# EAGLE board Raspberry_Pi_Circuit_Board_2 (EAGLE 9.6.2)
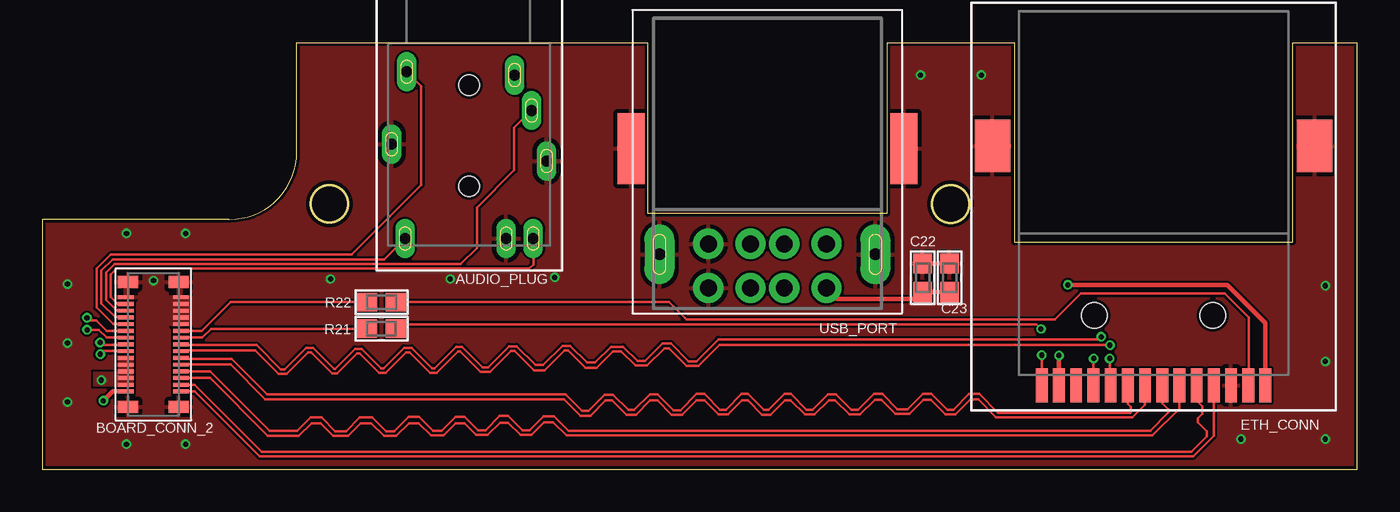
[diagram p0: board, top side]
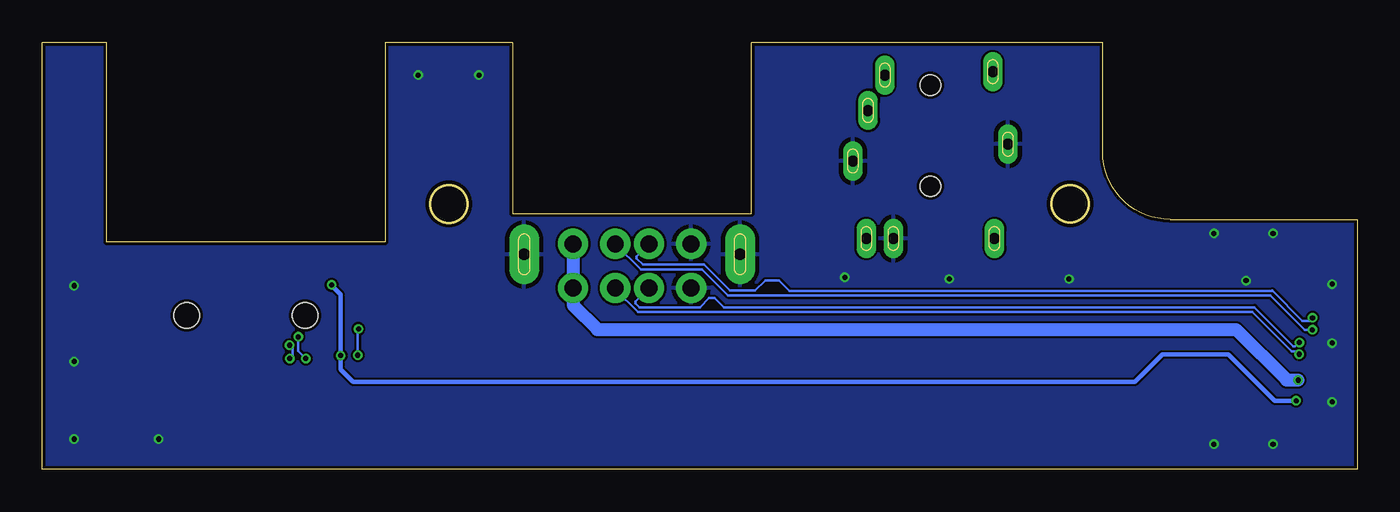
[diagram p1: board, bottom side, seen from below]

Size 78 x 25.33 mm. Coordinates in mm from the lower left corner, seen from the top.
Outline: 11.1,14.83 arc90 15.1,18.83 15.1,25.33 35.94,25.33 35.94,15.18 50.11,15.18 50.11,25.33 57.66,25.33 57.66,13.51 74.16,13.51 74.16,25.33 78,25.33 78,0 23.01,0 23.01,0 9.01,0 9.01,0 0,0 0,14.83 11.1,14.83
Outline: 11.1,14.83 11.1,14.83
Outline: circle at 53.89,15.75 radius 1.1
Outline: circle at 17.04,15.76 radius 1.1
Copper layers (1*16): Top 0.035mm / dielectric 1.6mm / Bottom 0.035mm
Design rules "default2 *": minimum track width 5mil, minimum drill 0.3mm, track to track 5mil, track to pad 5mil, pad to pad 5mil, via to via 5mil, smd to smd 5mil, copper to edge 0.2mm, drill to drill 6mil, minimum pad ring 0.13mm, minimum via ring 0.13mm, stop-mask expansion 4mil, vias tented up to drill 0mil, thermal gap 10mil

## Footprints (pad centres in the part's own frame; a part is rotated, then mirrored left to right if it is on the bottom)
AUDIOPLUG-ASJ-192-Y-TR = drill 0.65 long: 1 2.7,0.6; 2 -3.8,-9.1; 3 -3.7,0.8; 4 3.7,-1.5; 5 2.2,-9.1; 6 3.8,-9.1; MS1 4.6,-4.5; MS2 -4.6,-3.5 | hole 1.2: 0,0; 0,-6
MEZZANINE-AXT530124 = smd 0.23 x 0.92: 1 -2.8,1.64; 2 -2.4,1.64; 3 -2,1.64; 4 -1.6,1.64; 5 -1.2,1.64; 6 -0.8,1.64; 7 -0.4,1.64; 8 0,1.64; 9 0.4,1.64; 10 0.8,1.64; 11 1.2,1.64; 12 1.6,1.64; 13 2,1.64; 14 2.4,1.64; 15 2.8,1.64; 16 -2.8,-1.64; 17 -2.4,-1.64; 18 -2,-1.64; 19 -1.6,-1.64; 20 -1.2,-1.64; 21 -0.8,-1.64; 22 -0.4,-1.64; 23 0,-1.64; 24 0.4,-1.64; 25 0.8,-1.64; 26 1.2,-1.64; 27 1.6,-1.64; 28 2,-1.64; 29 2.4,-1.64; 30 2.8,-1.64 | smd 0.7 x 1.2: MP_1 -3.7,1.5; MP_2 3.7,1.5; MP_3 -3.7,-1.5; MP_4 3.7,-1.5
CAP-603 = smd 1.2 x 1.1: A -0.85,0; C 0.85,0
ETH-GLPLX-SMT-188S7-QQ-Y/G = smd 0.7 x 2.03: GND -4.59,9.015; LEDG+ 5.61,9.015; LEDG- 6.63,9.015; LEDY+ -6.63,9.015; LEDY- -5.61,9.015; TD1+ 3.57,9.015; TD1- 2.55,9.015; TD2+ 1.53,9.015; TD2- 0.51,9.015; TD3+ -0.51,9.015; TD3- -1.53,9.015; TD4+ -2.55,9.015; TD4- -3.57,9.015; VCC 4.59,9.015 | smd 2.1 x 3.1: MP_1 -9.55,-5.2; MP_2 9.55,-5.2 | hole 1.5: -3.5,4.85; 3.5,4.85
RES-603 = smd 1.2 x 1.1: A -0.85,0; C 0.85,0
USB-614108646521 = drill 1: D+1 1,0; D+2 1,-2.62; D-1 -1,0; D-2 -1,-2.62; GND1 3.5,0; GND2 3.5,-2.62; VDD1 -3.5,0; VDD2 -3.5,-2.62 | drill 0.7 pad 1.778 long: MP_1 -6.4,-2; MP_2 6.4,-2 | smd 1.6 x 4.2: MP_3 -8.1,-8.28; MP_4 8.1,-8.28

## Placement (x,y rotation side)
AUDIO_PLUG  AUDIOPLUG-ASJ-192-Y-TR  [AUDIOPLUG-ASJ-192-Y-TR]  25.32,22.8 0 top
BOARD_CONN_2  MEZZANINE-AXT530124  [MEZZANINE-AXT530124]  6.59,7.42 90 top
C22  10uF  [CAP-603]  52.21,11.37 270 top
C23  10uF  [CAP-603]  53.82,11.37 270 top
ETH_CONN  ETH-GLPLX-SMT-188S7-QQ-Y/G  [ETH-GLPLX-SMT-188S7-QQ-Y/G]  65.92,14 180 top
R21  1K  [RES-603]  20.13,8.34 180 top
R22  1K  [RES-603]  20.13,9.93 180 top
USB_CONN  USB-614108646521  [USB-614108646521]  43.01,10.76 180 top

## Library data of the parts
AUDIO_PLUG BOARD_CONN_2 C22 C23 ETH_CONN R21 R22 USB_CONN = Personal

## Nets
AGND: AUDIO_PLUG.3 BOARD_CONN_2.11
D+1: BOARD_CONN_2.8 USB_CONN.D+1
D+2: BOARD_CONN_2.10 USB_CONN.D+2
D-1: BOARD_CONN_2.7 USB_CONN.D-1
D-2: BOARD_CONN_2.9 USB_CONN.D-2
ETH0_N: BOARD_CONN_2.22 ETH_CONN.TD1-
ETH0_P: BOARD_CONN_2.23 ETH_CONN.TD1+
ETH1_N: BOARD_CONN_2.20 ETH_CONN.TD2-
ETH1_P: BOARD_CONN_2.21 ETH_CONN.TD2+
ETH2_N: BOARD_CONN_2.18 ETH_CONN.TD3-
ETH2_P: BOARD_CONN_2.19 ETH_CONN.TD3+
ETH3_N: BOARD_CONN_2.16 ETH_CONN.TD4-
ETH3_P: BOARD_CONN_2.17 ETH_CONN.TD4+
ETH_LEDG: BOARD_CONN_2.24 R21.C
ETH_LEDY: BOARD_CONN_2.25 R22.C
GND: AUDIO_PLUG.5 AUDIO_PLUG.MS1 AUDIO_PLUG.MS2 BOARD_CONN_2.15 BOARD_CONN_2.26 BOARD_CONN_2.27 BOARD_CONN_2.28 BOARD_CONN_2.29 BOARD_CONN_2.30 BOARD_CONN_2.MP_1 BOARD_CONN_2.MP_2 BOARD_CONN_2.MP_3 BOARD_CONN_2.MP_4 C22.A C23.A ETH_CONN.GND ETH_CONN.MP_1 ETH_CONN.MP_2 USB_CONN.GND1 USB_CONN.GND2 USB_CONN.MP_1 USB_CONN.MP_2 USB_CONN.MP_3 USB_CONN.MP_4
N$1: ETH_CONN.LEDG- R21.A
N$2: ETH_CONN.LEDY- R22.A
OUTL: AUDIO_PLUG.2 BOARD_CONN_2.12
OUTR: AUDIO_PLUG.4 BOARD_CONN_2.13
SHUTDOWN: AUDIO_PLUG.6 BOARD_CONN_2.14
VDD: BOARD_CONN_2.2 BOARD_CONN_2.3 BOARD_CONN_2.4 BOARD_CONN_2.5 BOARD_CONN_2.6 C22.C C23.C USB_CONN.VDD1 USB_CONN.VDD2
VDD3.3: BOARD_CONN_2.1 ETH_CONN.LEDG+ ETH_CONN.LEDY+

## Tracks (layer width: path | path; a pad name or v marks a point on that pad's centre or on a via)
AGND
  Top 0.152: BOARD_CONN_2.11 4.21,8.62 3.23,9.6 3.23,11.91 4.07,12.74 18.34,12.74 22.49,16.89 22.49,22.74 AUDIO_PLUG.3
D+1  (via drill 0.3)
  Top 0.152: BOARD_CONN_2.8 4.92,7.39 3.61,7.39 3.47,7.53 v3.43,7.53
  Bottom 0.152: USB_CONN.D+1 42.8,9.97 42.8,9.86 42.56,9.62 38.99,9.62 38.45,10.17 38.13,10.17 38.13,10.16 37.58,9.61 6.11,9.61 3.79,7.29 3.71,7.29 3.48,7.53 v3.43,7.53
D+2  (via drill 0.3)
  Top 0.152: BOARD_CONN_2.10 3.82,8.22 3.21,8.83 2.83,8.83 v2.66,9
  Bottom 0.152: USB_CONN.D+2 42.01,13.37 42.74,12.63 42.74,12.52 42.37,12.14 38.75,12.14 37.21,10.61 35.72,10.61 35.12,11.21 34.29,11.21 33.69,10.6 5.05,10.6 5.04,10.61 3.25,8.82 2.84,8.82 v2.66,9
D-1  (via drill 0.3)
  Top 0.152: BOARD_CONN_2.7 4.93,7.04 3.65,7.04 v3.45,6.84
  Bottom 0.152: USB_CONN.D-1 44.01,10.68 42.67,9.33 6.22,9.33 3.9,7.01 3.62,7.01 v3.45,6.84
D-2  (via drill 0.3)
  Top 0.152: BOARD_CONN_2.9 4.95,7.83 3.82,7.83 3.36,8.29 v2.66,8.29
  Bottom 0.152: USB_CONN.D-2 42.49,11.87 38.88,11.87 37.34,10.32 5.15,10.32 3.12,8.29 v2.66,8.29
ETH0_N  (via drill 0.3)
  Top 0.152: BOARD_CONN_2.22 8.28,7.06 12.62,7.06 14.03,5.66 14.5,5.66 15.78,6.94 15.96,6.94 17.2,5.69 17.49,5.69 18.68,6.88 18.83,6.88 19.98,5.72 20.36,5.72 21.57,6.94 21.79,6.94 23,5.72 23.39,5.72 24.66,7 24.78,7 26,5.77 26.55,5.77 27.81,7.03 28.02,7.03 29.18,5.87 29.8,5.87 30.98,7.06 31.2,7.06 32.24,6.02 32.87,6.02 33.85,7 34.34,7 35.19,6.16 35.88,6.16 36.91,7.18 37.18,7.18 38.23,6.14 38.91,6.14 40.16,7.38 63.32,7.38 v63.33,7.37 | v63.32,6.58 63.32,5.58 63.37,5.53 ETH_CONN.TD1-
  Bottom 0.152: v63.32,6.58 63.15,6.75 63.15,7.22 63.31,7.39 v63.33,7.37
ETH0_P  (via drill 0.3)
  Top 0.152: BOARD_CONN_2.23 8.28,7.38 12.71,7.38 14.14,5.94 14.39,5.94 15.66,7.22 16.07,7.22 17.32,5.97 17.38,5.97 18.56,7.16 18.94,7.16 20.09,6 20.25,6 21.46,7.22 21.9,7.22 23.12,6 23.27,6 24.54,7.28 24.9,7.28 26.12,6.05 26.43,6.05 27.69,7.31 28.14,7.31 29.25,6.19 29.72,6.19 30.87,7.34 31.31,7.34 32.31,6.34 32.8,6.34 33.74,7.28 34.46,7.28 35.3,6.44 35.76,6.44 36.79,7.46 37.3,7.46 38.34,6.42 38.8,6.42 40.1,7.72 62.67,7.72 v62.81,7.86 v62.81,7.87 | v62.37,6.58 62.35,6.56 ETH_CONN.TD1+
  Bottom 0.152: v62.37,6.58 62.81,7.02 v62.81,7.87
ETH1_N
  Top 0.152: BOARD_CONN_2.20 11.18,6.22 13.23,4.17 30.94,4.17 31.92,3.19 32.52,3.19 33.42,4.1 33.81,4.1 34.67,3.24 35.22,3.24 36.06,4.09 36.49,4.09 37.34,3.24 37.96,3.24 38.81,4.09 39.27,4.09 40.1,3.26 40.66,3.26 41.49,4.09 41.85,4.09 42.69,3.24 43.19,3.24 44.05,4.1 44.38,4.1 45.23,3.26 45.8,3.26 46.65,4.11 47.02,4.11 47.88,3.25 48.49,3.25 49.38,4.14 49.77,4.14 50.62,3.29 51.44,3.29 52.26,4.12 52.7,4.12 53.56,3.26 54.16,3.26 55.04,4.15 55.52,4.15 56.58,3.09 64.66,3.09 65.41,3.83 ETH_CONN.TD2-
ETH1_P
  Top 0.152: BOARD_CONN_2.21 8.28,6.57 11.23,6.57 13.35,4.45 31.05,4.45 32.03,3.47 32.4,3.47 33.37,4.43 33.87,4.43 34.78,3.52 35.1,3.52 36.04,4.46 36.51,4.46 37.45,3.52 37.85,3.52 38.8,4.47 39.28,4.47 40.21,3.54 40.55,3.54 41.48,4.47 41.85,4.47 42.81,3.52 43.07,3.52 44.02,4.47 44.41,4.47 45.34,3.54 45.68,3.54 46.6,4.45 47.07,4.45 47.99,3.53 48.37,3.53 49.32,4.48 49.83,4.48 50.73,3.58 51.32,3.58 52.22,4.48 52.74,4.48 53.67,3.54 54.05,3.54 54.97,4.47 55.59,4.47 56.69,3.37 64.55,3.37 64.56,3.38 64.56,3.71 64.39,3.88 ETH_CONN.TD2+
ETH2_N
  Top 0.152: BOARD_CONN_2.18 9.96,5.42 13.38,2 15.22,2 15.97,2.74 16.51,2.74 17.26,1.99 18.14,1.99 18.89,2.74 19.51,2.74 20.27,1.98 21,1.98 21.76,2.74 22.34,2.74 23.06,2.02 23.8,2.02 24.52,2.73 25.05,2.73 25.73,2.04 26.42,2.04 27.15,2.77 27.63,2.77 28.36,2.04 29.02,2.04 29.76,2.79 30.31,2.79 31.09,2.01 31.71,2.01 | ETH_CONN.TD3- 67.45,3.6 65.86,2.01 31.71,2.01 | 31.71,2.01
ETH2_P
  Top 0.152: BOARD_CONN_2.19 9.96,5.82 13.5,2.28 15.11,2.28 15.91,3.08 16.57,3.08 17.38,2.27 18.02,2.27 18.83,3.08 19.57,3.08 20.39,2.26 20.88,2.26 21.73,3.12 22.36,3.12 23.18,2.3 23.69,2.3 24.52,3.12 25.05,3.12 25.85,2.32 26.3,2.32 27.14,3.16 27.64,3.16 28.48,2.32 28.9,2.32 29.73,3.15 30.35,3.15 31.21,2.29 65.71,2.29 66.8,3.38 66.8,3.55 66.43,3.92 ETH_CONN.TD3+
ETH3_N
  Top 0.152: BOARD_CONN_2.16 9.05,4.62 12.91,0.77 68.26,0.77 69.49,1.99 ETH_CONN.TD4-
ETH3_P
  Top 0.152: BOARD_CONN_2.17 9.05,5.02 13.02,1.05 68.15,1.05 69.07,1.97 69.07,2.25 68.53,2.8 68.53,3.04 68.79,3.3 68.79,3.74 68.47,4.07 ETH_CONN.TD4+
ETH_LEDG
  Top 0.152: R21.C 10.01,8.34 9.49,7.82 BOARD_CONN_2.24
ETH_LEDY
  Top 0.152: BOARD_CONN_2.25 9.47,8.22 11.18,9.93 R22.C
GND  (via drill 0.3)
  Top 0.152: BOARD_CONN_2.MP_2 5.09,10.36 BOARD_CONN_2.15
  Top 0.254: C22.A C23.A
  other vias: 8.5,1.5 8.5,14 5,14 1.5,11 1.5,7.5 1.5,4 6.6,11.2 5,1.5 17.1,11.3 24.2,11.3 30.4,11.4 55.7,23.4 52.1,23.4 76.1,1.8 71.1,1.8 76.1,10.9 76.1,6.4
  pour Top (rank 2): -5.6,31.56 -5.6,-3.24 -1.52,-7.32 80.05,-7.32 84.62,-2.76 84.62,25.39 77.88,32.13 -4.56,32.13 -5.03,31.66
  pour Bottom: -4.94,38.12 -8.55,34.52 -8.55,24.53 -8.55,-3.81 0.19,-12.55 78.06,-12.55 87.75,-2.85 87.75,29.1 77.97,38.88
  pour Top (no thermals): 7.11,10.25 7.11,8.57 9.32,8.57 9.32,10.25
N$1  (via drill 0.3)
  Top 0.152: R21.A 21.25,8.61 58.97,8.61 v59.24,8.34 | v59.28,6.78 ETH_CONN.LEDG-
  Bottom 0.152: v59.24,8.34 59.28,8.3 v59.28,6.78
N$2
  Top 0.152: R22.A 37.17,9.93 38.12,8.99 38.2,8.9 38.21,8.9 60.06,8.9 61.61,10.45 70.13,10.45 71.56,9.02 71.56,5.01 ETH_CONN.LEDY-
OUTL
  Top 0.152: BOARD_CONN_2.12 4.94,9.04 4.33,9.04 3.51,9.85 3.51,11.79 4.18,12.47 20.29,12.47 AUDIO_PLUG.2
OUTR
  Top 0.152: AUDIO_PLUG.4 27.99,20.27 27.99,17.75 25.78,15.54 25.78,13.15 24.82,12.19 4.3,12.19 3.79,11.68 3.79,10.05 4.43,9.42 BOARD_CONN_2.13
SHUTDOWN
  Top 0.152: AUDIO_PLUG.6 29.14,13.69 29.14,12.17 28.87,11.91 4.42,11.91 4.07,11.56 4.07,10.24 4.49,9.82 BOARD_CONN_2.14
VDD  (via drill 0.3)
  Top 0.254: USB_CONN.VDD1 47.15,10.13 51.82,10.13 C22.C C23.C
  Bottom 0.762: USB_CONN.VDD2 USB_CONN.VDD1 46.51,9.74 45.08,8.3 7.2,8.3 4.19,5.3 v3.51,5.3
  pour Top (no thermals): 3.08,5.72 3.08,4.98 5.35,4.98 5.35,6.65 4.56,6.65 4.56,5.73 3.22,5.73
VDD3.3  (via drill 0.3)
  Top 0.254: ETH_CONN.LEDY+ 72.55,8.7 70.3,10.95 v60.83,10.95 | v60.3,6.75 v60.31,6.75 ETH_CONN.LEDG+ | v3.63,4.08 4.17,4.62 BOARD_CONN_2.1
  Bottom 0.254: v60.83,10.95 60.83,10.92 60.3,10.39 v60.3,6.75 60.3,5.93 59.55,5.19 13.21,5.19 11.57,6.83 7.66,6.83 4.91,4.08 v3.63,4.08

## Text on the board
tNames: AUDIO_PLUG | USB_PORT